# EAGLE board astroCACTUS (EAGLE 9.1.0)
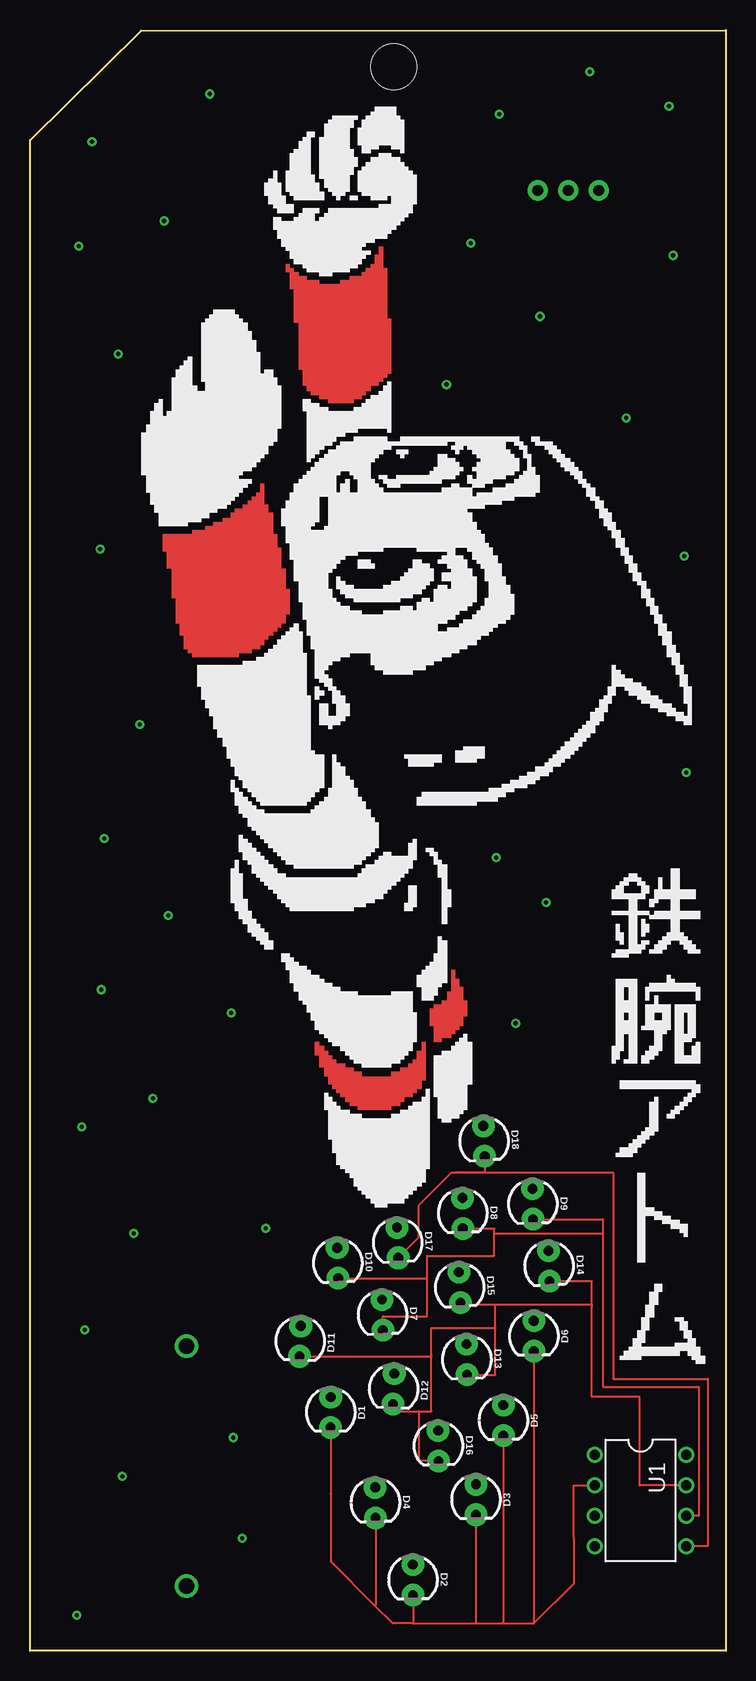
[diagram p0: board, top side]
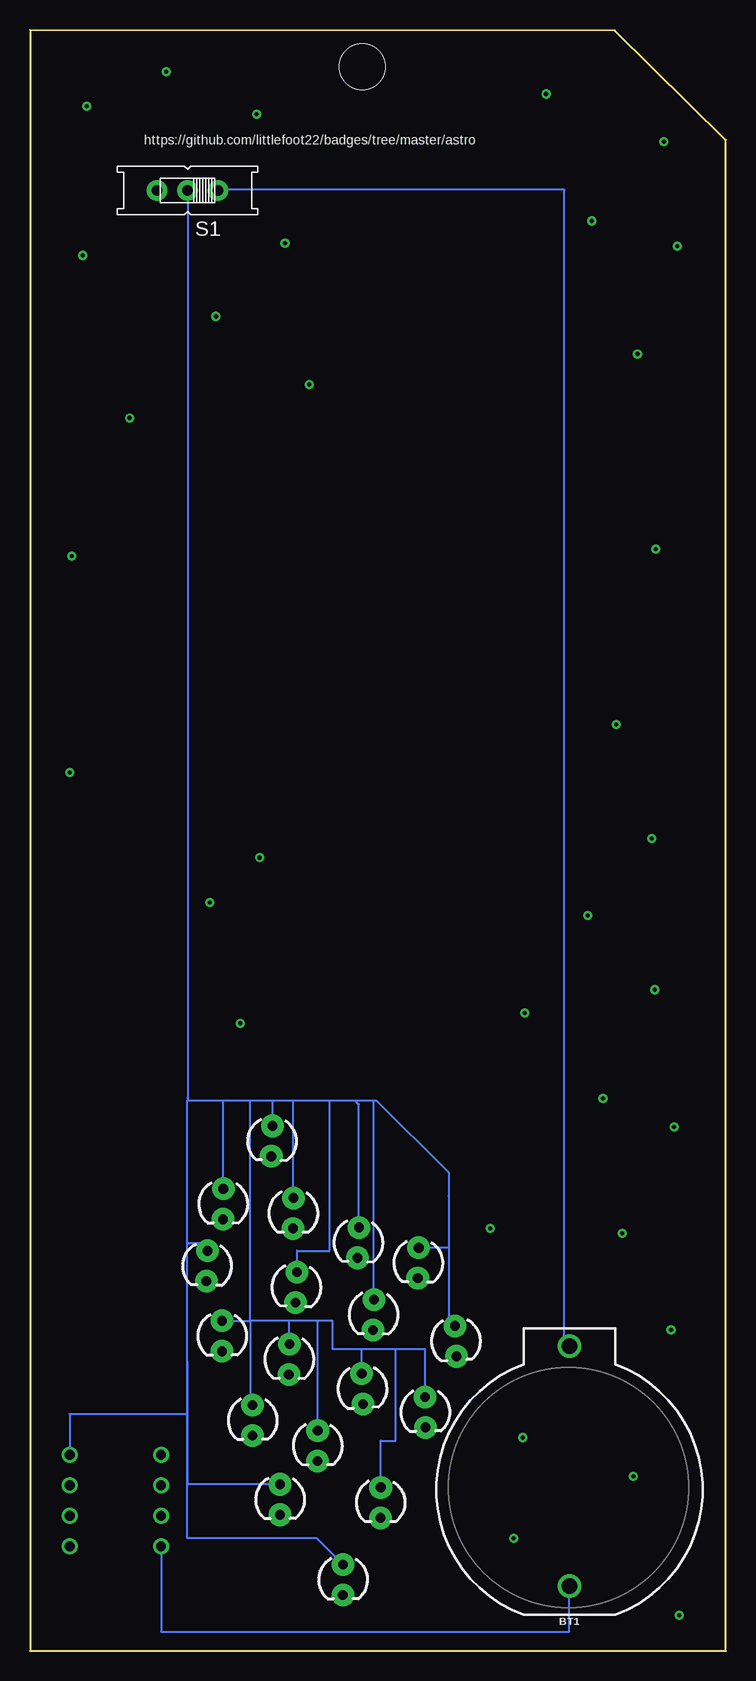
[diagram p1: board, bottom side, seen from below]

Size 57.99 x 135.11 mm. Coordinates in mm from the lower left corner, seen from the top.
Outline: 0,0 0,125.94 9.26,135.07 57.99,135.11 57.99,0 0,0
Copper layers (1*16): Top 0.035mm / dielectric 1.5mm / Bottom 0.035mm
Design rules "default": minimum track width 6mil, minimum drill 0.35mm, track to track 6mil, track to pad 6mil, pad to pad 6mil, via to via 6mil, smd to smd 6mil, copper to edge 40mil, drill to drill 6mil, minimum pad ring 10mil, minimum via ring 8mil, stop-mask expansion 4mil, vias tented up to drill 0mil, thermal gap 10mil
Holes 3.81 mm at 30.31,132.07

## Footprints (pad centres in the part's own frame; a part is rotated, then mirrored left to right if it is on the bottom)
BATTCOM_20MM_PTH = drill 1.3: 1 11.85,0; 2 -8.15,0
LED_3MM = drill 0.813 pad 1.88: A -1.27,0; K 1.27,0
EG1218 = drill 0.9 pad 1.676: O -2.54,0; P 0,0; S 2.54,0
PDIP08_300MIL = drill 0.813: 1 -3.81,-3.81; 2 -1.27,-3.81; 3 1.27,-3.81; 4 3.81,-3.81; 5 3.81,3.81; 6 1.27,3.81; 7 -1.27,3.81; 8 -3.81,3.81

## Placement (x,y rotation side)
BT1  [BATTCOM_20MM_PTH]  13.03,13.55 90 bottom
D1  [LED_3MM]  25.05,19.9 269.5 top
D2  [LED_3MM]  31.91,5.93 270.4 top
D3  [LED_3MM]  37.16,12.61 270 top
D4  [LED_3MM]  28.78,12.36 270.7 top
D5  [LED_3MM]  39.44,19.22 270 top
D6  [LED_3MM]  41.98,26.24 270 top
D7  [LED_3MM]  29.37,28.02 271.8 top
D8  [LED_3MM]  36.05,36.48 270.6 top
D9  [LED_3MM]  41.9,37.24 270.7 top
D10  [LED_3MM]  25.64,32.33 271.7 top
D11  [LED_3MM]  22.51,25.82 267.5 top
D12  [LED_3MM]  30.3,21.84 267.5 top
D13  [LED_3MM]  36.39,24.3 271.2 top
D14  [LED_3MM]  43.25,32.08 272.1 top
D15  [LED_3MM]  35.8,30.3 273 top
D16  [LED_3MM]  34.02,17.1 270.5 top
D17  [LED_3MM]  30.64,34.03 272.4 top
D18  [LED_3MM]  37.83,42.49 272.5 top
S1  [EG1218]  44.86,121.74 180 bottom
U1  ATTINY85-20P  [PDIP08_300MIL]  50.87,12.53 270 top

## Library data of the parts
BT1 = SparkFun-Batteries; PROD_ID: BATT-09031; SF_SKU: PRT-00783
D1-D18 = SparkFun-LED; PROD_ID: DIO-08794
S1 = adafruit
U1 = _hhn_attiny25_45_85

## Nets
N$1: D1.K D2.K D3.K D4.K D5.K D6.K U1.2
N$2: BT1.1 S1.O
N$3: D11.K D12.K D13.K D14.K D15.K D16.K U1.7
N$4: D7.K D8.K D9.K D10.K U1.6
N$5: BT1.2 U1.4
N$6: D17.K D18.K U1.5
N$31: D1.A D2.A D3.A D4.A D5.A D6.A D7.A D8.A D9.A D10.A D11.A D12.A D13.A D14.A D15.A D16.A D17.A D18.A S1.P U1.8

## Tracks (layer width: path | path; a pad name or v marks a point on that pad's centre or on a via)
N$1
  Top 0.152: D1.K 25.04,13.12 | 25.04,13.12 25.04,7.45 25.06,7.45 28.7,3.81 | 31.92,2.29 37.25,2.29 | 37.25,2.29 39.37,2.29 | 41.91,2.29 41.99,2.29 45.29,5.59 45.29,9.48 45.29,13.8 U1.2 | D2.K 31.92,2.29 | D3.K 37.16,2.29 37.25,2.29 | D5.K 39.44,2.29 39.37,2.29 | D6.K 41.98,2.29 41.91,2.29 | D1.K | 28.7,3.81 30.22,2.29 30.48,2.29 31.92,2.29 | D4.K 28.79,3.81 28.78,3.81 | 25.04,13.12 | 28.78,3.81 28.7,3.81 | 28.78,3.81 28.7,3.81 | 39.37,2.29 41.91,2.29
N$2
  Bottom 0.152: S1.O 42.28,121.79 13.46,121.79 13.46,25.82 BT1.1
N$3
  Top 0.152: U1.7 50.8,13.8 50.8,21.16 46.82,21.16 46.82,28.7 | 46.82,28.7 46.82,30.82 D14.K | D13.K 38.77,23.03 38.77,26.92 | 38.77,26.92 38.77,28.78 | 38.77,28.78 38.77,28.87 46.82,28.87 46.82,28.7 | 38.77,28.78 38.77,28.87 36.04,28.87 D15.K | D11.K 33.44,24.55 33.44,24.64 | 38.77,26.92 33.44,26.92 33.44,24.64 | 32.42,19.98 30.83,19.98 D12.K | 32.42,19.98 33.44,19.98 33.44,24.64 | D16.K 32.42,15.83 32.42,19.98
N$4
  Top 0.152: D9.K 47.75,35.98 47.75,34.79 | U1.6 55.72,11.26 55.72,22.01 47.75,22.01 47.75,34.71 47.75,34.79 | D8.K 38.69,35.21 38.69,34.79 | 38.69,34.79 47.75,34.79 | D7.K 29.41,27.9 33.1,27.9 33.1,31.07 | 33.1,31.07 33.1,32.93 38.6,32.93 38.69,32.93 38.69,34.79 | D10.K 33.1,31.07 | 47.75,34.79
N$5
  Bottom 0.152: U1.4 47.06,1.61 13.04,1.61 BT1.2 | BT1.2
N$6
  Top 0.152: U1.5 56.48,8.72 56.48,22.69 48.59,22.69 48.59,39.87 48.6,39.88 35.47,39.88 | 35.47,39.88 37.89,39.88 D18.K | 35.47,39.88 35.15,39.88 32.38,37.12 32.38,34.45 D17.K
N$7  (via drill 0.35)
  other vias: 39.11,128.09
N$8  (via drill 0.35)
  other vias: 4.57,26.75
N$9  (via drill 0.35)
  other vias: 36.74,117.34
N$10  (via drill 0.35)
  other vias: 42.5,111.24
N$11  (via drill 0.35)
  other vias: 53.59,116.32
N$12  (via drill 0.35)
  other vias: 49.69,102.78
N$13  (via drill 0.35)
  other vias: 7.7,14.56
N$14  (via drill 0.35)
  other vias: 53.25,128.77
N$15  (via drill 0.35)
  other vias: 17.69,9.4
N$16  (via drill 0.35)
  other vias: 54.52,91.26
N$17  (via drill 0.35)
  other vias: 34.71,105.57
N$18  (via drill 0.35)
  other vias: 16.93,17.78
N$19  (via drill 0.35)
  other vias: 46.65,131.64
N$20  (via drill 0.35)
  other vias: 11.17,119.2
N$21  (via drill 0.35)
  other vias: 3.89,2.96
N$24  (via drill 0.35)
  other vias: 5.16,125.8
N$25  (via drill 0.35)
  other vias: 14.98,129.78
N$26  (via drill 0.35)
  other vias: 7.37,108.11
N$27  (via drill 0.35)
  other vias: 4.06,117.08
N$28  (via drill 0.35)
  other vias: 5.84,91.85
N$29  (via drill 0.35)
  other vias: 9.14,77.21
N$30  (via drill 0.35)
  other vias: 6.18,67.73
N$31
  Bottom 0.152: S1.P 44.86,46.05 44.86,45.88 | 44.86,45.88 41.82,45.88 | 39.62,45.88 41.4,45.88 41.82,45.88 | 39.62,45.88 36.66,45.88 | 36.66,45.88 35.39,45.88 | 35.39,45.88 33.02,45.88 | 33.02,45.88 30.9,45.88 | 30.9,45.88 29.12,45.88 | 23.11,33.6 23.11,27.64 D11.A | 23.11,33.6 D10.A | D18.A 37.78,45.88 36.66,45.88 | D17.A 30.58,45.57 30.9,45.88 | D9.A 41.88,45.83 41.82,45.88 | D8.A 36.04,45.88 35.39,45.88 | D15.A 35.73,33.36 33.02,33.36 33.02,45.88 | D14.A 43.2,33.95 44.7,33.95 44.78,33.95 44.87,33.95 | 44.87,33.95 44.87,45.88 44.86,45.88 | D6.A 39.62,27.51 | 39.62,27.51 39.62,45.88 | D13.A 36.37,27.51 | 36.37,27.51 | 36.37,27.51 39.54,27.51 | 39.54,27.51 39.62,27.51 | D7.A 29.33,45.88 29.12,45.88 | 30.35,25.14 30.35,25.06 D12.A | 33.95,27.51 32.76,27.51 32.76,25.14 30.35,25.14 | 33.95,27.51 36.37,27.51 | D16.A 34.01,27.51 33.95,27.51 | D1.A 25.06,25.14 27.51,25.14 | 27.51,25.14 30.35,25.14 | D4.A 28.76,17.52 27.51,17.52 27.51,25.06 27.51,25.14 | 39.54,27.51 39.61,27.51 39.61,20.66 D5.A | 44.87,24.13 44.87,33.95 | 44.87,24.13 44.87,9.4 34.1,9.4 D2.A | 23.11,33.6 23.11,37.93 23.11,39.87 29.12,45.88 | D3.A 44.87,13.88 44.87,24.13 | 44.87,24.13 44.87,19.73 54.68,19.73 U1.8 | 44.87,23.28 | 44.87,23.28 44.87,24.13 | 44.87,23.28 44.87,22.6 | 44.87,22.6
N$32  (via drill 0.35)
  other vias: 11.51,61.29
N$33  (via drill 0.35)
  other vias: 4.32,43.68
N$34  (via drill 0.35)
  other vias: 5.93,55.11
N$35  (via drill 0.35)
  other vias: 40.47,52.32
N$36  (via drill 0.35)
  other vias: 43.01,62.39
N$37  (via drill 0.35)
  other vias: 54.69,73.23
N$38  (via drill 0.35)
  other vias: 16.76,53.17
N$39  (via drill 0.35)
  other vias: 8.64,34.79
N$40  (via drill 0.35)
  other vias: 10.24,46.05
N$41  (via drill 0.35)
  other vias: 19.64,35.22
N$42  (via drill 0.35)
  other vias: 38.86,66.12
(copper drawn outside any net)
  shapes: Top area x517

## Text on the board
bPlace: https://github.com/littlefoot22/badges/tree/master/astro